# EAGLE board Esquemático (EAGLE 9.6.2)
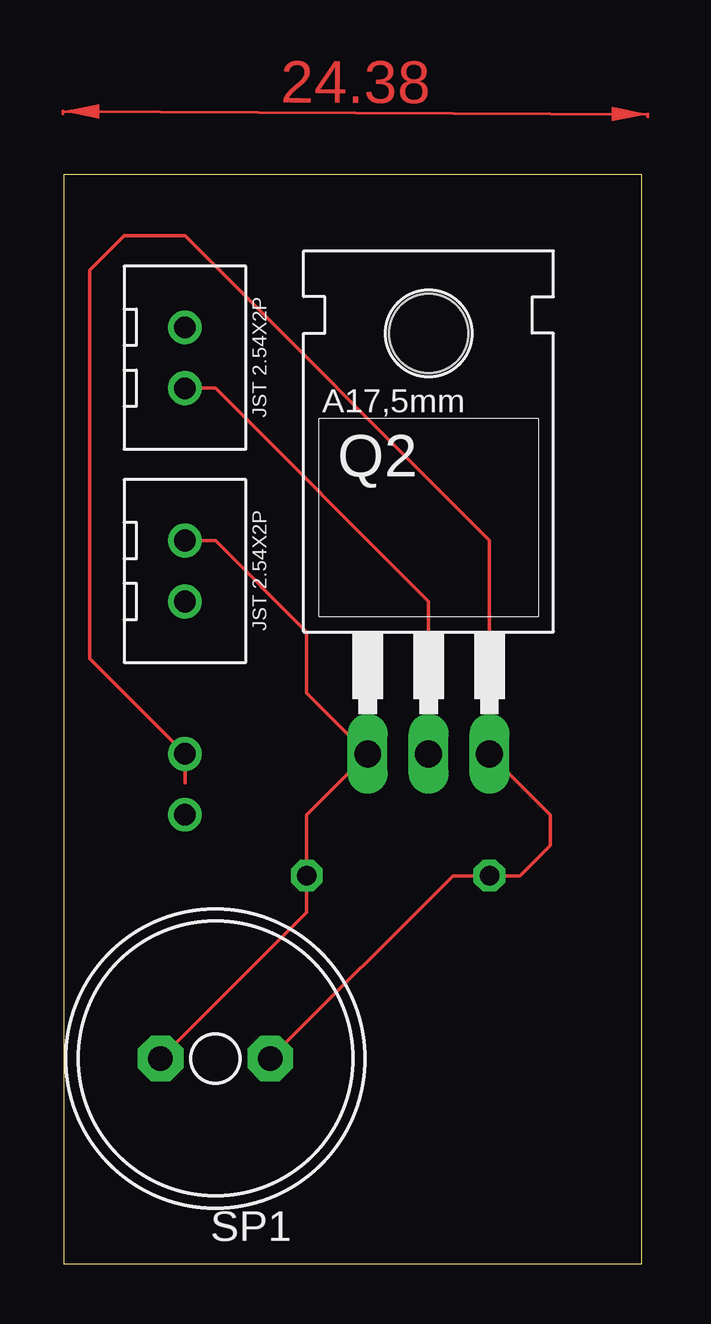
[diagram p0: board, top side]
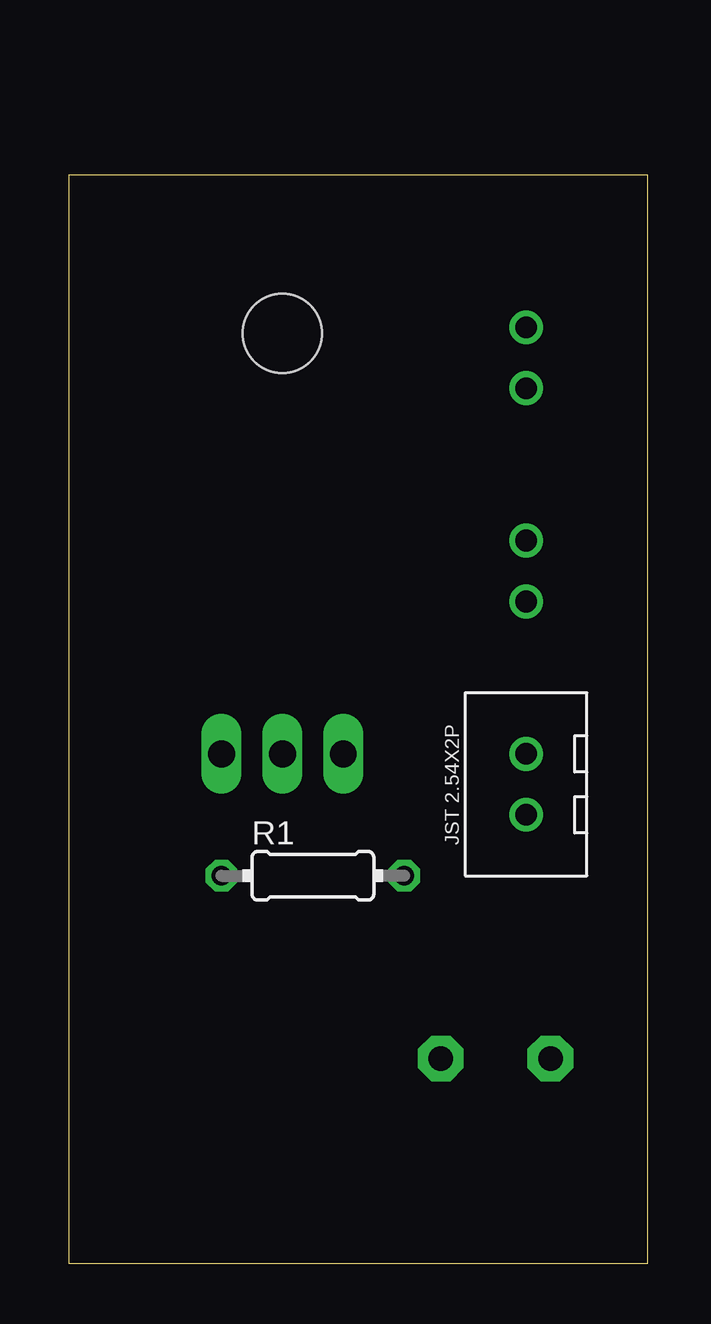
[diagram p1: board, bottom side, seen from below]

Size 24.11 x 45.39 mm. Coordinates in mm from the lower left corner, seen from the top.
Outline: 24.11,45.39 0,45.39 0,0 24.11,0 24.11,45.39
Copper layers (1*16): Top 0.035mm / dielectric 1.5mm / Bottom 0.035mm
Design rules "default": minimum track width 6mil, minimum drill 0.35mm, track to track 6mil, track to pad 6mil, pad to pad 6mil, via to via 6mil, smd to smd 6mil, copper to edge 40mil, drill to drill 6mil, minimum pad ring 10mil, minimum via ring 8mil, stop-mask expansion 4mil, vias tented up to drill 0mil, thermal gap 10mil

## Footprints (pad centres in the part's own frame; a part is rotated, then mirrored left to right if it is on the bottom)
TO220 = drill 1.118 long: 1 -2.54,-6.35; 2 0,-6.35; 3 2.54,-6.35 | hole 3.302: 0,11.176
0204/7 = drill 0.813 octagon: 1 -3.81,0; 2 3.81,0
AL11P = drill 1.016 pad 1.905 octagon: + 2.286,0; - -2.286,0
JST2.54X2P_FOOTPRINT = drill 0.9: 1 -1.27,0; 2 1.27,0

## Placement (x,y rotation side)
Q2  IRF540  [TO220]  15.22,27.61 0 top
R1  1k  [0204/7]  13.95,16.18 0 bottom
SP1  AL11P  [AL11P]  6.33,8.56 180 top
U$1  JST2.54X2P  [JST2.54X2P_FOOTPRINT]  5.06,28.88 270 top
U$2  JST2.54X2P  [JST2.54X2P_FOOTPRINT]  5.06,37.77 270 top
U$4  JST2.54X2P  [JST2.54X2P_FOOTPRINT]  5.06,19.99 90 bottom

## Library data of the parts
Q2 = transistor-fet
R1 = rcl; SPICEPREFIX: R
SP1 = buzzer; OC_FARNELL: unknown; OC_NEWARK: unknown
U$1 U$2 U$4 = CRD

## Nets
0: Q2.3 R1.1 SP1.- U$4.2
N$1: Q2.1 R1.2 SP1.+ U$1.1
N$2: Q2.2 U$2.2
N$4: U$2.1
VCC: U$4.1

## Tracks (layer width: path | path; a pad name or v marks a point on that pad's centre or on a via)
0
  Top 0.152: 5.06,20.04 U$4.2 1.09,25.23 1.09,41.42 2.52,42.85 5.06,42.85 17.76,30.15 Q2.3 | Q2.3 18.4,21.9 17.76,22.53 | Q2.3 20.3,18.72 20.3,17.45 19.03,16.18 R1.1 16.24,16.18 SP1.-
N$1
  Top 0.152: U$1.1 6.33,30.15 10.14,26.34 10.14,23.8 Q2.1 10.14,18.72 R1.2 10.14,14.66 SP1.+
N$2
  Top 0.152: 15.03,21.26 Q2.2 15.22,27.61 6.33,36.5 U$2.2
(copper drawn outside any net)
  shapes: Top area x2